# Altium PCB 20pin_2x10_1.27mm_to_2.54mm.PcbDoc
Units mm, origin at the board's own origin, x right, y up, seen from the top; angles counter-clockwise.
Board outline 24.5 x 31 mm, 2 copper layers (Top Layer, Bottom Layer); 2 components, 20 nets, 40 pads, 18 vias.
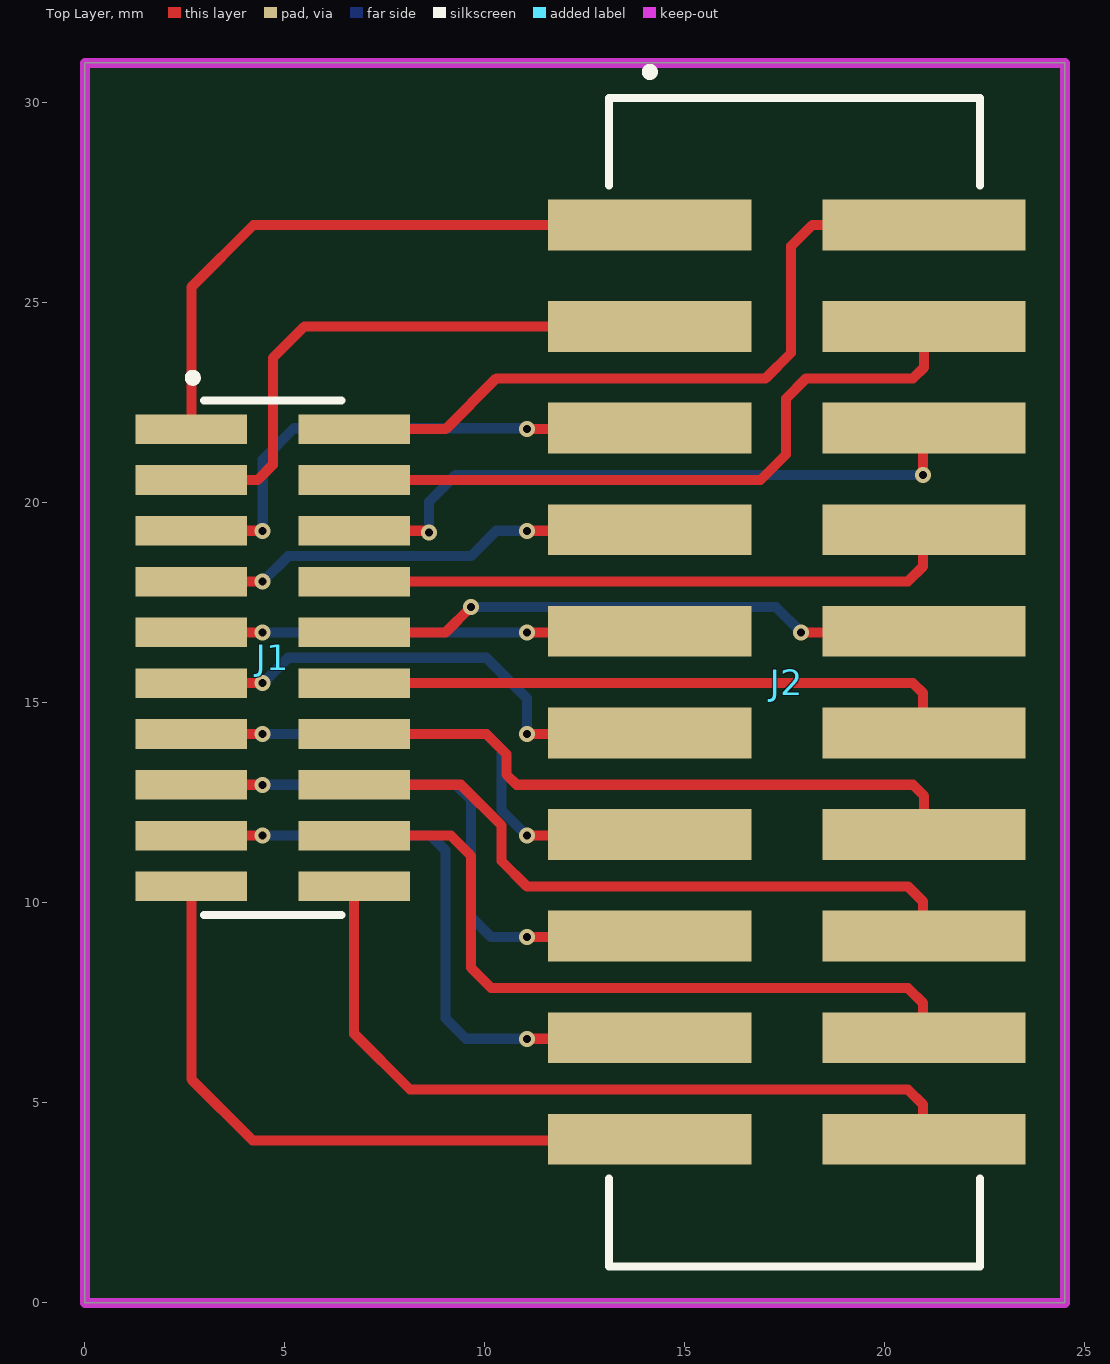
[diagram p0: Top Layer view]
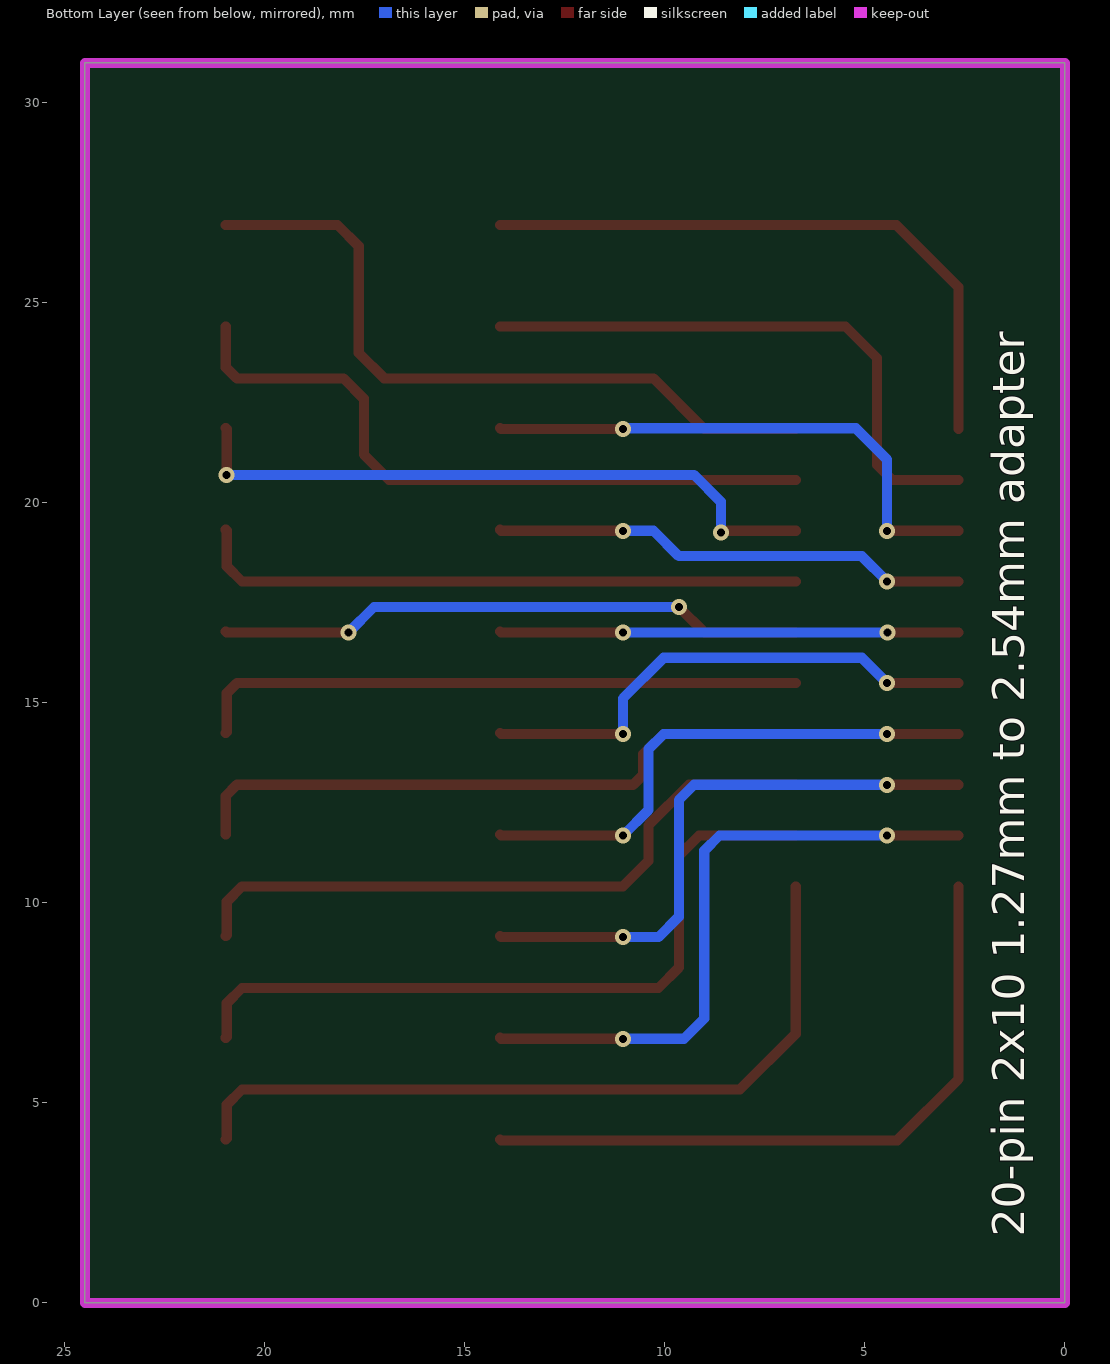
[diagram p1: Bottom Layer view, seen from below]

## Layer stack, top to bottom
Top Solder: solder mask 0.0102, Solder Resist, Dk 3.5
Top Layer: signal copper 0.0356
Dielectric 1: dielectric 0.32, FR-4, Dk 4.8
Bottom Layer: signal copper 0.0356
Bottom Solder: solder mask 0.0102, Solder Resist, Dk 3.5

## Board outline
0,0 0,31 24.5,31 24.5,0

## Design rules (kind name [scope] priority, off if disabled: settings)
Clearance [All] p1: gap=0.254 ignorepadtopadclearanceinfootprint=FALSE except(0: Arc-Hole Track-Hole SMDPad-Hole THPad-Hole Via-Hole Fill-Hole Poly-Hole Region-Hole Text-Hole)
PolygonConnect [All] p1: connectstyle=Relief reliefconductorwidth=0.254 reliefentries=4 polygonreliefangle="90 Angle" airgapwidth=0.254
RoutingVias [All] p1: holewidth=0.2 width=0.4 viastyle="Through Hole" minholewidth=0.2 minwidth=0.4 maxholewidth=0.711 maxwidth=1.27
SolderMaskExpansion [All] p1: expansion=0.102 istentingtop=FALSE
Width [All] p1: maxlimit=0.254 minlimit=0.254 preferedwidth=0.254
30 further rules are at their usual default settings.

## Components (designator, comment, footprint, x,y, rotation, side; value= is the part's Value field where it differs from the comment)
J1 "CON SMD 20-PIN 2-ROW 1.27" "SMD HEADER 2x10 1.27" 4.699,16.129 r270 top
J2 "CON SMD 20-PIN 2-ROW 2.54" "SMD HEADER 2x10 2.54" 17.526,16.764 r270 top

## Footprints (in the part's own frame and the unit in brackets; to place one, negate y for a bottom-side part, rotate by r counter-clockwise, add the part's x,y. Pads: shape width x height; smd on the part's side, far side on the other; paste and mask are expansions set on the pad)
"SMD HEADER 2x10 1.27" [mm]
  rect 0.74x2.79 smd: 1(-5.715,-2.038) 2(-5.715,2.032) 3(-4.445,-2.038) 4(-4.445,2.032) 5(-3.175,-2.038) 6(-3.175,2.032) 7(-1.905,-2.038) 8(-1.905,2.032) 9(-0.635,-2.038) 10(-0.635,2.032) 11(0.635,-2.038) 12(0.635,2.032) 13(1.905,-2.038) 14(1.905,2.032) 15(3.175,-2.038) 16(3.175,2.032) 17(4.445,-2.038) 18(4.445,2.032) 19(5.715,-2.038) 20(5.715,2.032)
  silkscreen extent -7.1,-2.1 6.44,1.71, body extent -6.35,-2.95 6.35,2.9, height 5.96
"SMD HEADER 2x10 2.54" [mil]
  rect 50x200 smd: 1(-401,-134) 2(-401,136) 3(-301,-134) 4(-301,136) 5(-201,-134) 6(-201,136) 7(-101,-134) 8(-101,136) 9(-1,-134) 10(-1,136) 11(99,-134) 12(99,136) 13(199,-134) 14(199,136) 15(299,-134) 16(299,136) 17(399,-134) 18(399,136) 19(499,-134) 20(499,136)
  silkscreen extent -556,-174 624,191, body extent -530,-220 620,220, height 399

## Part data
J1: "FTSH-110-01-L-DV"
J2: "HTSS-110-01-L-DV"

## Via types
v1: diameter 0.4, hole 0.2, Top Layer to Bottom Layer, tented both sides, 18 vias

## Nets (pads, with @x,y where several pads share a name; then routed paths per layer and width w, separated by ;. In a path a pad name is that pad's centre, name@x,y a point inside that pad or via, vN(x,y) a via of type N, cw(c..) or ccw(c..) an arc to the next point about the centre after c; other vN are vias at no path point)
NetJ1_1: J1.1 J2.1 | length 15.7
  Top Layer w0.254: J1.1 2.661,25.394 4.216,26.949 J2.1
NetJ1_2: J1.2 J2.2 | length 17.9
  Top Layer w0.254: J1.2 9.017,21.844 10.287,23.114 17.018,23.114 17.653,23.749 17.653,26.416 18.186,26.949 J2.2
NetJ1_3: J1.3 J2.3 | length 14.6
  Top Layer w0.254: J1.3 4.318,20.574 4.699,20.955 4.699,23.622 5.486,24.409 J2.3
NetJ1_4: J1.4 J2.4 | length 17.3
  Top Layer w0.254: J1.4 16.891,20.574 17.526,21.209 17.526,22.606 18.034,23.114 20.701,23.114 20.98,23.393 J2.4
NetJ1_5: J1.5 J2.5 | length 13.6
  Top Layer w0.254: J1.5 v1(4.445,19.304) ; v1(11.049,21.844) 14.097,21.844 J2.5
  Bottom Layer w0.254: v1(4.445,19.304) 4.445,21.082 5.229,21.866 11.027,21.866 v1(11.049,21.844)
NetJ1_6: J1.6 J2.6 | length 16.5
  Top Layer w0.254: J1.6 8.513,19.304 8.561,19.256 v1(8.6,19.256) ; v1(20.955,20.701) 20.955,21.844 J2.6
  Bottom Layer w0.254: v1(8.6,19.256) 8.6,20.03 9.271,20.701 v1(20.955,20.701)
NetJ1_7: J1.7 J2.7 | length 12
  Top Layer w0.254: J1.7 v1(4.445,18.034) ; v1(11.049,19.304) 14.097,19.304 J2.7
  Bottom Layer w0.254: v1(4.445,18.034) 5.08,18.669 9.652,18.669 10.287,19.304 v1(11.049,19.304)
NetJ1_8: J1.8 J2.8 | length 15.3
  Top Layer w0.254: J1.8 20.574,18.034 20.955,18.415 20.955,19.304 J2.8
NetJ1_9: J1.9 J2.9 | length 11.5
  Top Layer w0.254: J1.9 v1(4.435,16.765) ; v1(11.049,16.764) 14.097,16.764 J2.9
  Bottom Layer w0.254: v1(4.435,16.765) v1(11.049,16.764)
NetJ1_10: J1.10 J2.10 | length 14.8
  Top Layer w0.254: J1.10 9.017,16.764 v1(9.652,17.399) ; v1(17.907,16.764) 20.955,16.764 J2.10
  Bottom Layer w0.254: v1(9.652,17.399) 17.272,17.399 v1(17.907,16.764)
NetJ1_11: J1.11 J2.11 | length 13
  Top Layer w0.254: J1.11 v1(4.445,15.494) ; v1(11.049,14.224) 14.097,14.224 J2.11
  Bottom Layer w0.254: v1(4.445,15.494) 5.08,16.129 10.033,16.129 11.049,15.113 v1(11.049,14.224)
NetJ1_12: J1.12 J2.12 | length 15.3
  Top Layer w0.254: J1.12 20.701,15.494 20.955,15.24 20.955,14.275 J2.12
NetJ1_13: J1.13 J2.13 | length 13.4
  Top Layer w0.254: J1.13 v1(4.445,14.224) ; v1(11.049,11.684) 14.097,11.684 J2.13
  Bottom Layer w0.254: v1(4.445,14.224) 10.033,14.224 10.414,13.843 10.414,12.319 v1(11.049,11.684)
NetJ1_14: J1.14 J2.14 | length 16.2
  Top Layer w0.254: J1.14 10.033,14.224 10.541,13.716 10.541,13.208 10.795,12.954 20.701,12.954 20.98,12.675 J2.14
NetJ1_15: J1.15 J2.15 | length 14.8
  Top Layer w0.254: J1.15 v1(4.445,12.954) ; v1(11.049,9.144) 14.097,9.144 J2.15
  Bottom Layer w0.254: v1(4.445,12.954) 9.271,12.954 9.652,12.573 9.652,9.652 10.16,9.144 v1(11.049,9.144)
NetJ1_16: J1.16 J2.16 | length 16.8
  Top Layer w0.254: J1.16 9.398,12.954 10.414,11.938 10.414,11.049 11.049,10.414 20.574,10.414 20.955,10.033 20.955,9.195 J2.16
NetJ1_17: J1.17 J2.17 | length 16
  Top Layer w0.254: J1.17 v1(4.445,11.684) ; v1(11.049,6.604) 14.097,6.604 J2.17
  Bottom Layer w0.254: v1(4.445,11.684) 8.636,11.684 9.017,11.303 9.017,7.112 9.525,6.604 v1(11.049,6.604)
NetJ1_18: J1.18 J2.18 | length 18.5
  Top Layer w0.254: J1.18 9.144,11.684 9.652,11.176 9.652,8.382 10.16,7.874 20.574,7.874 20.955,7.493 20.955,6.655 J2.18
NetJ1_19: J1.19 J2.19 | length 16.9
  Top Layer w0.254: J1.19 2.661,5.594 4.191,4.064 14.097,4.064 J2.19
NetJ1_20: J1.20 J2.20 | length 19.5
  Top Layer w0.254: J1.20 6.731,6.731 8.128,5.334 20.574,5.334 20.955,4.953 20.955,4.115 J2.20

## Keep-outs
Keep-Out Layer:
  the board outline again, w0.254

## Silkscreen, mask and mechanical layers (free items; w line width, h text height)
Bottom Overlay:
  text "20-pin 2x10 1.27mm to 2.54mm adapter" at 1.016,1.651 h0.8 r270